# Allegro board 2019-09-09-4.brd
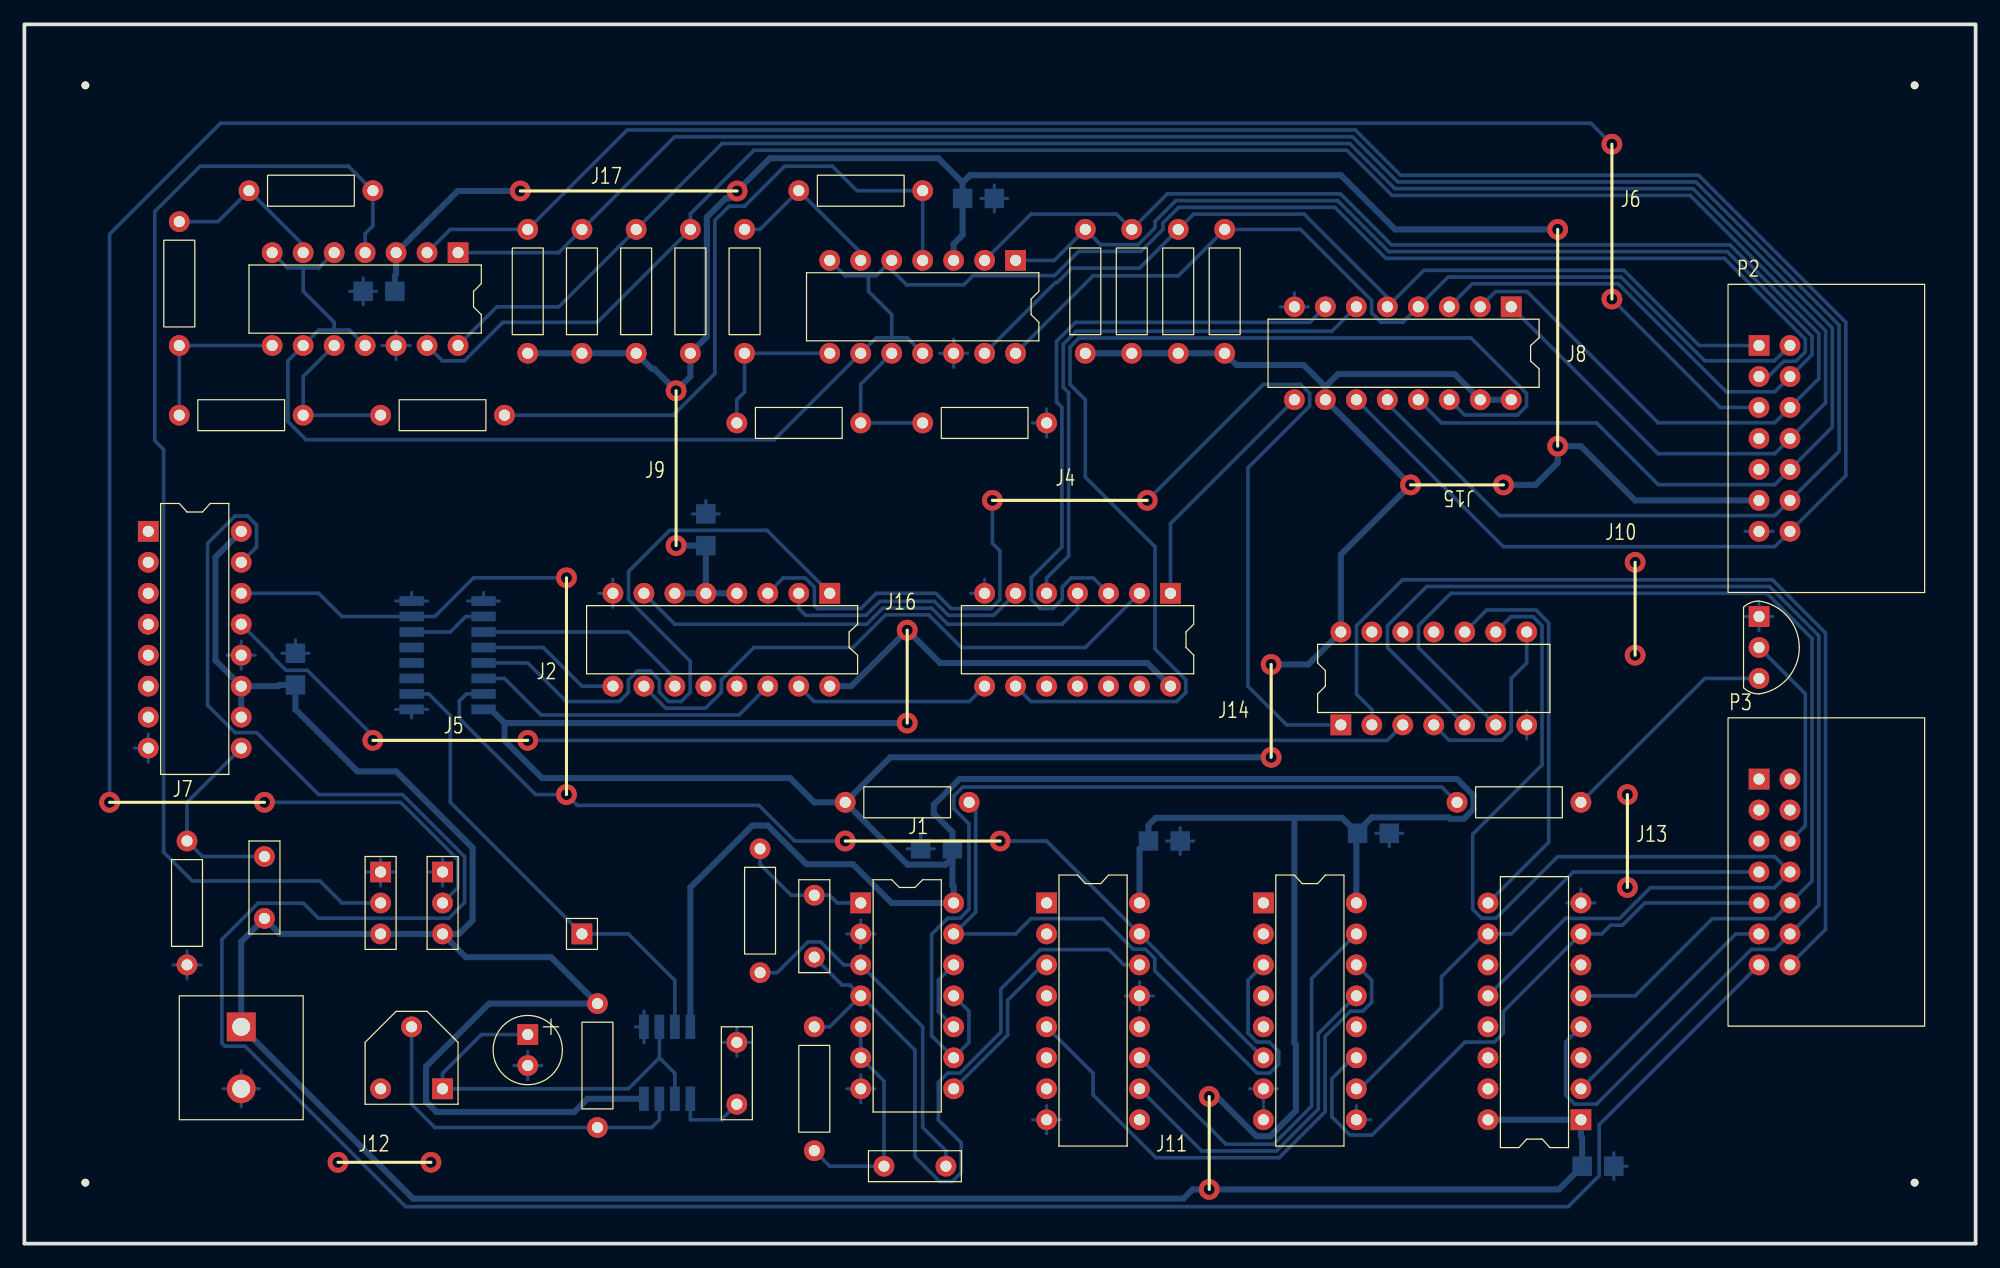
[diagram p0: board, top side]
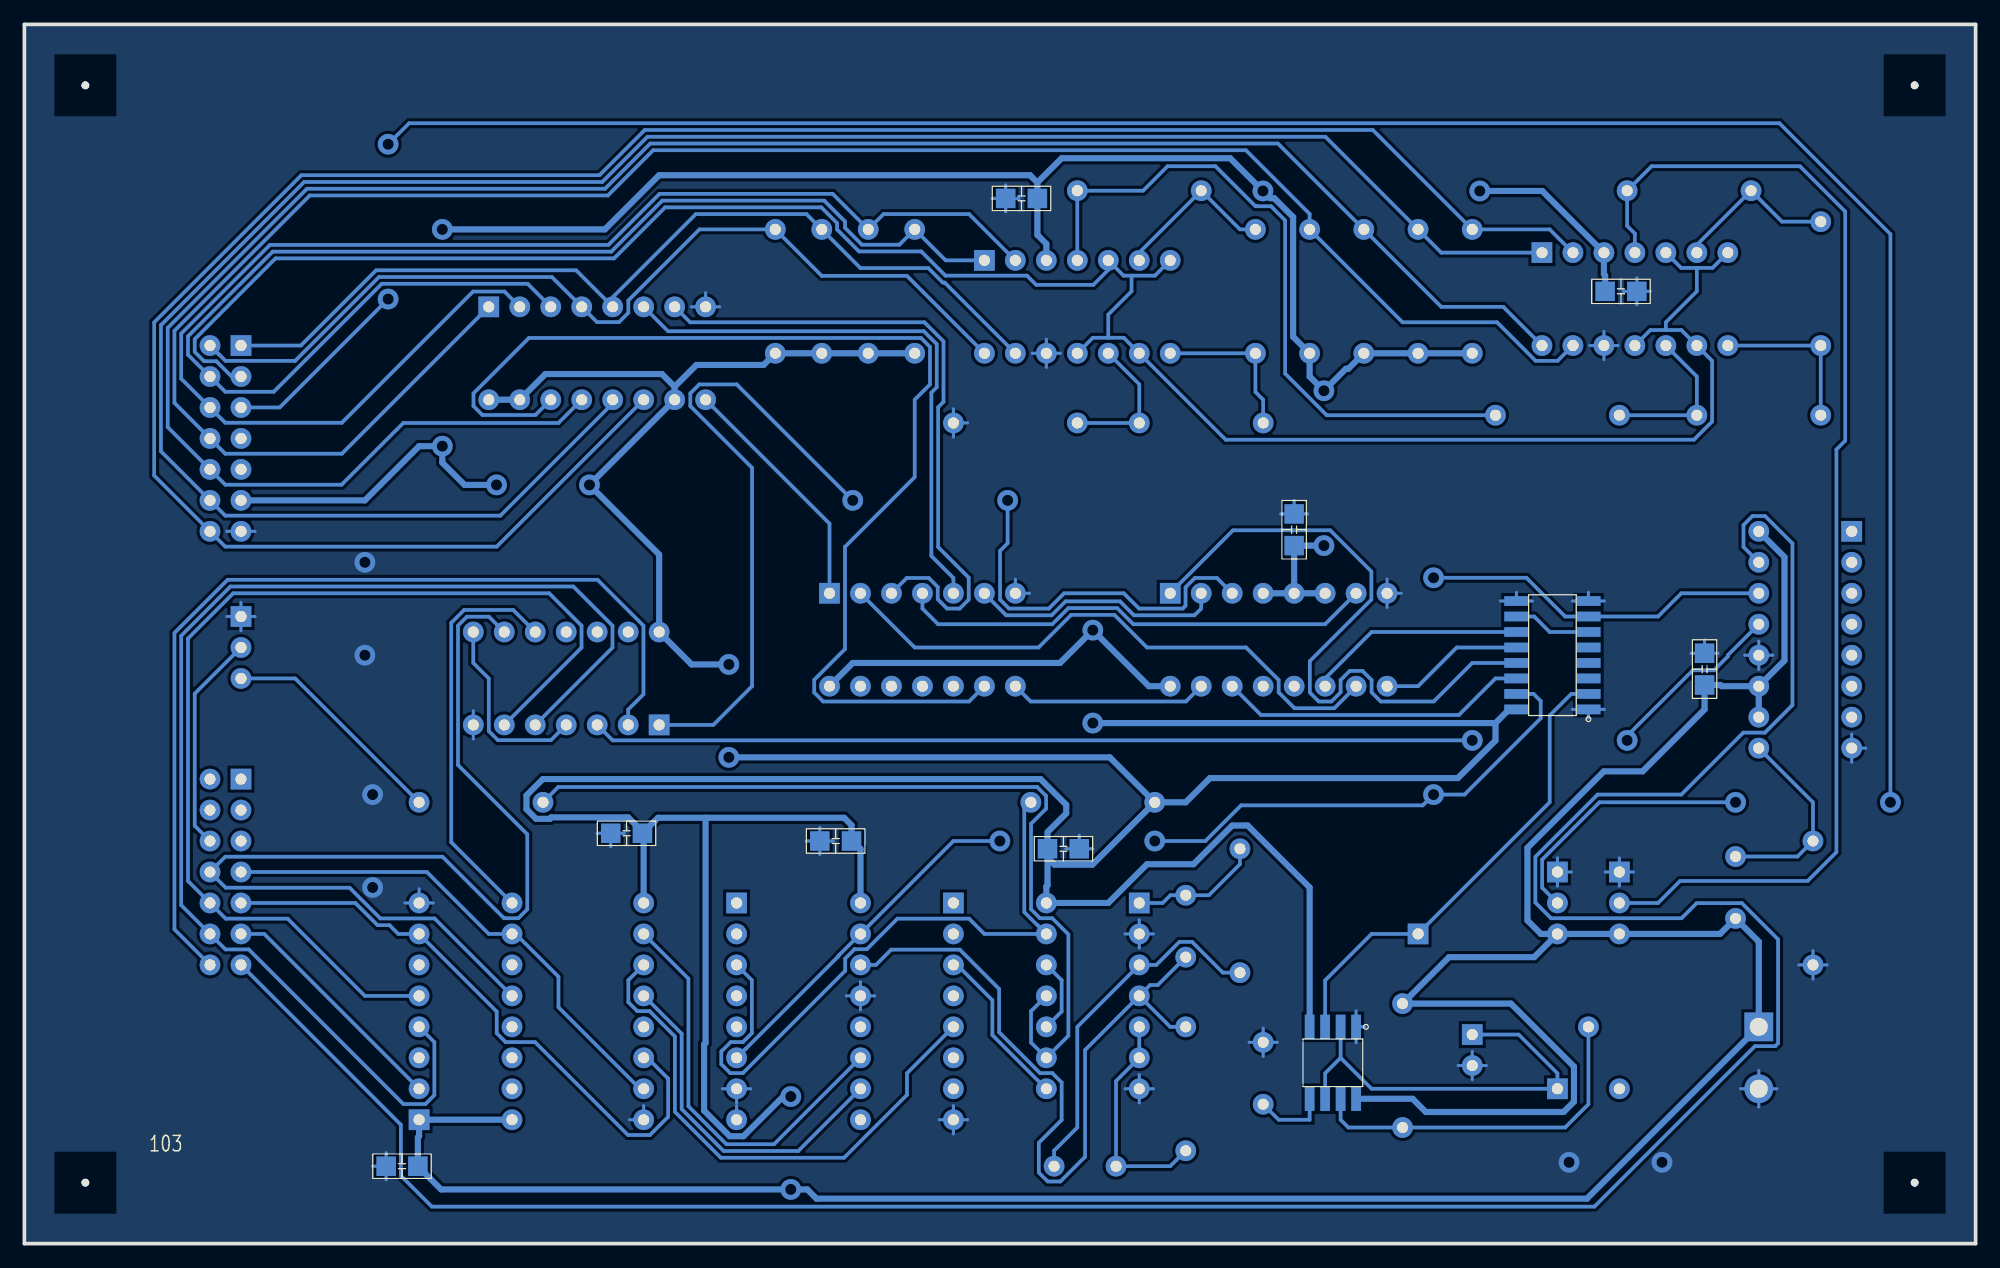
[diagram p1: board, bottom side, seen from below]

Outline 160 x 100 mm; copper layers: TOP, BOTTOM. Coordinates in mm from the lower left corner of the outline.
Outline path: 0,100 0,0 160,0 160,100 0,100

## Design rules (mm)
nets with their own width: min track width 0.5; nets +5V GND

## Placement (name value [footprint] x y rotation side)
C1  10uF  [CAP196]  41.27 17.14 0 top
C2  0.1uF  [CAP300]  58.42 11.43 90 top
C3  0.1uF  [CAP300]  19.68 26.67 90 top
C6  0.1uF  [SMDCAP]  30.48 78.11 180 bottom
C7  0.1uF  [SMDCAP]  76.83 85.72 0 bottom
C8  0.1uF  [SMDCAP]  55.88 57.15 90 bottom
C9  0.1uF  [SMDCAP]  109.22 33.66 0 bottom
C10  0.1uF  [SMDCAP]  92.08 33.02 0 bottom
C11  0.1uF  [SMDCAP]  22.23 45.72 90 bottom
C12  0.1uF  [SMDCAP]  127.64 6.35 0 bottom
C13  0.1uF  [SMDCAP]  76.2 32.38 180 bottom
C14  0.1uF  [CAP300]  64.77 28.57 270 top
C15  0.1uF  [CAP300]  75.56 6.35 180 top
J1  -  [JUMPER4]  80.01 33.02 0 bottom
J2  -  [JUMPER6]  44.45 36.83 270 bottom
J4  -  [JUMPER4]  92.08 60.96 0 bottom
J5  -  [JUMPER4]  41.27 41.27 0 bottom
J6  -  [JUMPER4]  130.18 77.47 270 bottom
J7  -  [JUMPER4]  6.99 36.2 180 bottom
J8  -  [JUMPER6]  125.73 83.19 90 bottom
J9  -  [JUMPER4]  53.44 57.25 270 bottom
J10  -  [JUMPER2]  132.08 55.88 90 bottom
J11  -  [JUMPER2]  97.16 12.06 90 bottom
J12  -  [JUMPER2]  33.34 6.67 0 bottom
J13  -  [JUMPER2]  131.44 29.21 270 bottom
J14  -  [JUMPER2]  102.23 39.88 270 bottom
J15  -  [JUMPER2]  121.28 62.23 0 bottom
J16  -  [JUMPER2]  72.39 42.7 270 bottom
J17  -  [JUMPER6]  58.44 86.34 0 bottom
NOREF  -  [unnamed]  155 5 0 top
NOREF#2  -  [unnamed]  155 95 0 top
NOREF#3  -  [unnamed]  5 5 0 top
NOREF#4  -  [#2]  0 0 90 top
NOREF#5  -  [unnamed]  5 95 0 top
NOREF#6  -  [#2]  0 0 0 top
P1  CON2  [POWER2]  17.78 17.78 270 top
P2  CON14  [JUMPER14]  142.24 73.66 270 top
P3  CON14  [JUMPER14]  142.24 38.1 270 top
Q1  2SC1815  [TO92]  142.24 51.44 270 top
R1  10K  [RES400]  46.99 19.68 180 top
R2  10K  [RES400]  28.57 86.36 90 top
R3  10K  [RES400]  12.7 83.82 180 top
R4  10K  [RES400]  12.7 67.94 270 top
R5  10K  [RES400]  29.21 67.94 270 top
R6  10K  [RES400]  73.66 86.36 90 top
R7  10K  [RES400]  59.05 83.19 180 top
R8  10K  [RES400]  58.42 67.31 270 top
R9  10K  [RES400]  73.66 67.31 270 top
R10  10K  [RES400]  41.27 73.03 0 top
R11  10K  [RES400]  45.72 73.03 0 top
R12  10K  [RES400]  50.16 73.03 0 top
R13  10K  [RES400]  54.61 73.03 0 top
R14  10K  [RES400]  90.81 73.03 0 top
R15  10K  [RES400]  87 73.03 0 top
R16  10K  [RES400]  98.42 73.03 0 top
R17  10K  [RES400]  94.61 73.03 0 top
R18  10K  [RES400]  13.34 33.02 180 top
R19  10K  [RES400]  60.33 32.38 180 top
R20  10K  [RES400]  64.77 17.78 180 top
R21  10K  [RES400]  67.31 36.2 270 top
R22  10K  [RES400]  127.64 36.2 90 top
TP1  TP  [JUMPER1]  45.72 25.4 0 top
U1  NE555  [SOP8]  50.8 17.78 270 bottom
U2  LM339  [DIP14_3]  35.56 81.28 270 top
U3  LM339  [DIP14_3]  81.28 80.64 270 top
U4  40147  [DIP16_3]  121.92 76.83 270 top
U5  4069  [DIP14_3]  93.98 53.34 270 top
U6  4518  [SOP16]  31.75 43.81 0 bottom
U7  4585  [DIP16_3]  66.04 53.34 270 top
U8  4027  [DIP16_3]  10.16 58.42 0 top
U9  4071  [DIP14_3]  107.95 42.55 90 top
U10  4001  [DIP14_3]  68.58 27.94 0 top
U11  4017  [DIP16_3]  83.82 27.94 0 top
U12  4051  [DIP16_3]  101.6 27.94 0 top
U13  4175  [DIP16_3]  127.64 10.16 180 top
VR1  1M  [RESADJ]  34.29 12.7 270 top
VR2  10K  [JUMPER3]  29.21 30.48 270 top
VR3  10K  [JUMPER3]  34.29 30.48 270 top

## Library data of the parts
C1 = Cap Pol
C2 C3 C14 C15 = Cap NP: Tolerance: ***; User Part Number: ***
C6-C13 = Cap TEXT
J1 J2 J4-J17 = JUMPER
P1 = CON2
P2 P3 = CON14: User Part Number: ***
Q1 = 2SC1815
R1-R22 = resistor: Tolerance: ***; User Part Number: ***
TP1 = TP: User Part Number: ***
U1 = NE555
U2 U3 = LM339: Tolerance: ***; User Part Number: ***
U4 = 40147: Tolerance: ***; User Part Number: ***
U5 = 4069: Tolerance: ***; User Part Number: ***
U6 = 4518
U7 = 4585: Tolerance: ***; User Part Number: ***
U8 = 4027: Tolerance: ***; User Part Number: ***
U9 = 4071: Tolerance: ***; User Part Number: ***
U10 = 4001: Tolerance: ***; User Part Number: ***
U11 = 4017: Tolerance: ***; User Part Number: ***
U12 = 4051: Tolerance: ***; User Part Number: ***
U13 = 4175: Tolerance: ***; User Part Number: ***
VR1 = VR1: Tolerance: ***; User Part Number: ***
VR2 VR3 = VR2: User Part Number: ***

## Footprints (pads in the part's own frame, mm; a bottom-side part is the same pattern mirrored in y, then rotated)
CAP196
  rect 1.7x1.7 hole 0.914: 1(0,0)
  round 1.7 hole 0.91: 2(0,-2.54)
CAP300
  round 1.7 hole 0.91: 1(0,0) 2(5.08,0)
DIP14_3
  rect 1.7x1.7 hole 0.914: 1(0,0)
  round 1.7 hole 0.91: 2(0,-2.54) 3(0,-5.08) 4(0,-7.62) 5(0,-10.16) 6(0,-12.7) 7(0,-15.24) 8(7.62,-15.24) 9(7.62,-12.7) 10(7.62,-10.16) 11(7.62,-7.62) 12(7.62,-5.08) 13(7.62,-2.54) 14(7.62,0)
DIP16_3
  rect 1.7x1.7 hole 0.914: 1(0,0)
  round 1.7 hole 0.91: 2(0,-2.54) 3(0,-5.08) 4(0,-7.62) 5(0,-10.16) 6(0,-12.7) 7(0,-15.24) 8(0,-17.78) 9(7.62,-17.78) 10(7.62,-15.24) 11(7.62,-12.7) 12(7.62,-10.16) 13(7.62,-7.62) 14(7.62,-5.08) 15(7.62,-2.54) 16(7.62,0)
JUMPER1
  rect 1.7x1.7 hole 0.914: 1(0,0)
JUMPER3
  rect 1.7x1.7 hole 0.914: 1(0,0)
  round 1.7 hole 0.91: 2(2.54,0) 3(5.08,0)
JUMPER14
  rect 1.7x1.7 hole 0.914: 1(0,0)
  round 1.7 hole 0.91: 2(0,2.54) 3(2.54,0) 4(2.54,2.54) 5(5.08,0) 6(5.08,2.54) 7(7.62,0) 8(7.62,2.54) 9(10.16,0) 10(10.16,2.54) 11(12.7,0) 12(12.7,2.54) 13(15.24,0) 14(15.24,2.54)
POWER2
  rect 2.362x2.362 hole 1.473: 1(0,0)
  round 2.362 hole 1.473: 2(5.08,0)
RES400
  round 1.7 hole 0.91: 1(0,0) 2(0,10.16)
RESADJ
  rect 1.7x1.7 hole 0.914: 1(0,0)
  round 1.7 hole 0.91: 2(-5.08,-2.54) 3(0,-5.08)
SMDCAP
  rect 1.6x1.6 smd: 1(0.1,0) 2(2.7,0)
SOP8
  rect 2x0.8 smd: 1(0,0) 2(0,-1.27) 3(0,-2.54) 4(0,-3.81) 5(5.9,-3.81) 6(5.9,-2.54) 7(5.9,-1.27) 8(5.9,0)
SOP16
  rect 2x0.8 smd: 1(0,0) 2(0,-1.27) 3(0,-2.54) 4(0,-3.81) 5(0,-5.08) 6(0,-6.35) 7(0,-7.62) 8(0,-8.89) 9(5.9,-8.89) 10(5.9,-7.62) 11(5.9,-6.35) 12(5.9,-5.08) 13(5.9,-3.81) 14(5.9,-2.54) 15(5.9,-1.27) 16(5.9,0)
TO92
  rect 1.7x1.7 hole 0.914: 1(0,0)
  round 1.7 hole 0.91: 2(2.54,0) 3(5.08,0)
unnamed
  round 0.635 hole 3 unplated: (0,0)

## Nets
+5V: C3.1 C6.1 C7.1 C8.1 C9.1 C10.1 C11.1 C12.1 C13.1 P1.1 P2.11 R1.1 R10.1 R11.1 R12.1 R13.1 R14.1 R15.1 R16.1 R17.1 R21.1 U1.4(RST) U1.8(VCC) U2.3 U3.3 U4.10(I\9\) U4.15(I\0\) U4.16(VCC) U5.14 U6.16 U7.4(A>BIN) U7.5(A<BIN) U7.6(A=BIN) U7.16(VCC) U8.10(J) U8.11(K) U8.16 U9.14 U10.14 U11.16(VCC) U12.16(VCC) U13.1(R\S\T\) U13.16(VCC) VR2.3(A) VR3.3(A)
GND: C1.2 C2.2 C6.2 C7.2 C8.2 C9.2 C10.2 C11.2 C12.2 C13.2 P1.2 P2.13 Q1.1(B) R9.2 R18.2 U1.1(GND) U2.12 U3.12 U4.8(GND) U5.7 U6.1(CLK) U6.8 U6.9(CLK) U7.8(GND) U8.8 U8.12(RST) U9.7 U10.2(I1) U10.7 U11.8(GND) U11.13(C\K\E\N\) U12.7(VEE) U12.8(GND) U12.9(C) U13.8(GND) VR2.1(WIPER) VR3.1(WIPER)
AD0: P2.14 R10.2 U2.2(OUT) U4.11(I\1\)
AD1: P2.12 R11.2 U2.1(OUT) U4.12(I\2\)
AD2: P2.10 R12.2 U2.14(OUT) U4.13(I\3\)
AD3: P2.8 R13.2 U2.13(OUT) U4.1(I\4\)
AD4: P2.6 R14.2 U3.2(OUT) U4.2(I\5\)
AD5: P2.4 R15.2 U3.1(OUT) U4.3(I\6\)
AD6: P2.2 R16.2 U3.14(OUT) U4.4(I\7\)
AD7: P2.1 R17.2 U3.13(OUT) U4.5(I\8\)
CLK: TP1.1 U1.3(OUT) U6.2(EN)
MOTOR-GND: P3.6 Q1.2(C)
MR: U6.7(CLR) U6.15(CLR) U8.14(Q\) U11.15(RST) U12.6(E\N\)
MR2: P3.13 U8.15(Q)
SW1: P3.14 U9.2(I1)
SW2: P3.12 U9.5(I0) U13.4(D0)
SW3: P3.10 U9.6(I1) U13.5(D1)
SW4: P3.8 U9.9(I1) U13.12(D2)
SWLED1: P3.11 U13.2(Q0)
SWLED2: P3.9 U12.11(A) U13.7(Q1)
SWLED3: P3.7 U12.10(B) U13.10(Q2)
VR3: P2.5 VR3.2(B)
VR-LED: P2.3 U2.5(+IN) U2.7(+IN) U2.9(+IN) U2.11(+IN) U3.5(+IN) U3.7(+IN) U3.9(+IN) U3.11(+IN)
N01288: R2.2 R3.1 U2.6(-IN)
N01292: R2.1 U2.4(-IN) VR2.2(B)
N01329: R3.2 R4.1 U2.8(-IN)
N01410: R4.2 R5.1 U2.10(-IN)
N01484: R5.2 R6.1 U3.4(-IN)
N01558: R6.2 R7.1 U3.6(-IN)
N01632: R7.2 R8.1 U3.8(-IN)
N01706: R8.2 R9.1 U3.10(-IN)
N02575: U4.9(A\) U5.1(I)
N02579: U4.7(B\) U5.3(I)
N02586: U4.6(C\) U5.5(I)
N02598: U4.14(D\) U5.9(I)
N02610: U5.8(O) U7.15(A3)
N02617: U5.6(O) U7.2(A2)
N02629: U5.4(O) U7.7(A1)
N02644: U5.2(O) U7.10(A0)
N02656: U7.3(A=BOUT) U9.1(I0)
N02681: U8.13(CLK) U9.3(O)
N02693: C3.2 R18.1 U8.9(SET)
N03322: U6.11(Q0) U7.11(B0)
N03324: U6.12(Q1) U7.9(B1)
N03326: U6.13(Q2) U7.1(B2)
N03328: U6.14(Q3) U7.14(B3)
N03342: U6.6(Q3) U6.10(EN)
N03473: C1.1 U1.2(TRIG) U1.6(THR) VR1.1
N03488: R1.2 U1.7(DISC) VR1.2
N03530: C2.1 U1.5(CV)
N06929: C15.1 R19.2 U10.3(O)
N06949: C15.2 R20.2 U10.5(I0) U10.6(I1)
N06975: C14.1 R19.1 U10.1(I0)
N06984: C14.2 R20.1 U10.4(O) U11.14(CLK)
N07032: U11.11(9) U12.15(X2)
N07059: U11.5(6) U12.14(X1)
N07071: U11.10(4) U12.13(X0)
N07083: U9.4(O) U9.8(I0)
N07087: U9.10(O) U13.9(CLK)
N07200: R21.2 U10.13(I1) U12.3(X)
N07279: R22.2 U10.9(I1) U10.11(O)
N07298: U10.10(O) U10.12(I0)
N07374: Q1.3(E) R22.1
N10291: U10.8(I0) U11.3(0)

Pads without a net: P2 7 9; P3 1 2 3 4 5; U5 10 11 12 13; U6 3 4 5; U7 12 13; U8 1 2 3 4 5 6 7; U9 11 12 13; U11 1 2 4 6 7 9 12; U12 1 2 4 5 12; U13 3 6 11 13 14 15; VR1 3

## Via types
v1: diameter 1.7, hole 0.91, TOP to BOTTOM, 32 vias

## Routing (per net, layer and track width the routed paths; a pad name or vN(x,y) marks a point on that pad's centre or on a via; arc(x,y) is an arc through that point)
+5V: length 802.7
  BOTTOM w0.5: R21.1 72.42,31.08 75.53,31.08 76.1,31.65 ; R21.1 71,39.88 v1(102.23,39.88) ; R21.1 64.77,36.2 62.78,38.18 42.45,38.18 39.37,41.27 39.37,42.7 ; VR3.3 VR2.3 20.95,25.4 C3.1 17.78,24.77 P1.1 31.87,3.69 95.04,3.69 95.8,4.45 v1(97.16,4.45) 125.83,4.45 C12.1 127.73,8.71 127.64,8.81 U13.1 U13.16 ; VR3.3 35.64,25.4 36.75,26.51 36.75,32.46 30.48,38.73 27.31,38.73 22.23,43.82 C11.1 20.92,45.82 20.82,45.72 U8.11 ; VR3.3 36.2,23.5 43.18,23.5 R1.1 38.1,19.68 32.94,14.52 32.94,11.64 33.78,10.79 45.09,10.79 46.17,11.88 U1.8 ; 104.14,34.92 104.14,16.47 104.26,16.34 104.26,10.91 102.16,8.81 101.04,8.81 97.78,12.06 v1(97.16,12.06) ; 104.14,34.92 108.05,34.92 C9.1 ; 104.14,34.92 92.78,34.92 92.17,34.32 C10.1 92.08,33.02 91.44,32.38 U11.16 ; U7.5 C8.1 v1(53.44,57.25) ; U7.5 U7.4 ; U7.5 U7.6 ; 76.94,87.03 74.94,89.02 61.13,89.02 v1(58.44,86.34) 57.85,85.75 57.52,85.75 55.96,84.19 55.96,74.38 R13.1 54.61,71.12 v1(53.44,69.95) 51.63,71.75 51.44,71.75 R12.1 R11.1 R10.1 ; 76.94,87.03 77.54,87.63 107.95,87.63 112.39,83.19 v1(125.73,83.19) ; 76.94,87.03 76.94,82.73 76.2,82 U3.3 ; U8.11 U8.10 ; U8.11 15.76,47.74 15.67,47.83 15.67,56.31 U8.16 ; C6.1 30.38,79.41 30.48,79.51 U2.3 35.54,86.34 v1(40.66,86.34) ; 121.92,69.22 119.38,69.22 117.27,71.32 107.72,71.32 106.68,70.28 ; 106.68,70.28 104.89,72.07 99.38,72.07 R16.1 R17.1 R14.1 R15.1 ; 106.68,70.28 106.68,69.22 v1(113.67,62.23) 107.95,56.52 U9.14 105.29,47.5 v1(102.23,47.5) ; U5.14 92.08,47.62 75.08,47.62 v1(72.39,50.31) 67.8,45.72 U7.16 ; 39.37,42.7 38.25,43.81 U6.16 ; 39.37,42.7 v1(72.39,42.7) ; C9.1 109.32,33.55 109.22,33.45 U12.16 ; C9.1 109.33,33.8 110.49,34.96 116.8,34.96 116.91,34.84 118.04,34.84 118.83,35.63 118.83,36.76 117.48,38.1 76.68,38.1 74.57,35.99 74.57,35.28 76.1,33.76 C13.1 76.1,31.65 ; 76.1,31.65 76.1,29.39 76.2,29.29 U10.14 71.12,27.94 67.94,31.11 64.14,31.11 60.96,34.29 59.69,34.29 54.61,29.21 U1.4 ; v1(121.28,62.23) 123.91,62.23 125.73,64.05 v1(125.73,65.41) 127.63,65.41 132.08,60.96 P2.11
GND: length 139.4
  BOTTOM w0.254: R9.2 83.82,68.47 ; R9.2 83.82,66.15 ; R9.2 82.66,67.31 ; 111.92,32.55 C9.2 ; C9.2 110.81,33.66 ; C9.2 113.03,33.66 ; U12.8 101.6,11.32 ; 102.98,76.83 U4.8 ; U4.8 104.14,77.99 ; U4.8 105.3,76.83 ; U6.8 33.06,52.7 ; U6.8 30.44,52.7 ; U6.8 31.75,53.41 ; 10.16,39.48 U8.8 ; U8.8 9,40.64 ; U8.8 10.16,41.8 ; VR2.1 30.37,30.48 ; VR2.1 29.21,31.64 ; VR2.1 29.21,29.32 ; VR2.1 28.05,30.48 ; 29.32,73.66 U2.12 ; U2.12 30.48,72.5 ; U2.12 30.48,74.82 ; U2.12 31.64,73.66 ; P1.2 17.78,14.19 ; P1.2 19.27,12.7 ; P1.2 17.78,11.21 ; P1.2 16.29,12.7 ; 94.78,31.91 C10.2 ; C10.2 95.88,33.02 ; C10.2 93.67,33.02 ; C10.2 94.78,34.13 ; 67.42,12.7 U10.7 ; U10.7 69.74,12.7 ; U10.7 68.58,11.54 ; U10.7 68.58,13.86 ; C6.2 28.89,78.11 ; C6.2 27.78,79.21 ; C6.2 26.67,78.11 ; C6.2 27.78,77 ; 110.38,10.16 U12.9 109.22,11.32 ; U13.8 128.79,27.94 ; U13.8 127.64,29.1 ; U13.8 126.48,27.94 ; U3.12 76.2,74.18 ; U3.12 76.2,71.87 ; U3.12 75.04,73.03 ; U3.12 77.36,73.03 ; 90.28,20.32 U11.13 ; U11.13 92.6,20.32 ; U11.13 91.44,21.48 ; U11.13 91.44,19.16 ; 48.26,52.18 U7.8 ; U7.8 47.1,53.34 ; U7.8 48.26,54.5 ; C7.2 79.53,86.83 ; C7.2 79.53,84.62 ; C7.2 78.43,85.72 ; C7.2 80.64,85.72 ; U8.12 18.94,48.26 ; U8.12 16.62,48.26 ; U8.12 17.78,49.42 ; U8.12 17.78,47.1 ; 123.19,43.7 U9.7 123.19,41.39 ; 72.39,32.38 C13.2 ; C13.2 74.61,32.38 ; C13.2 73.5,33.49 ; VR3.1 34.29,31.64 ; VR3.1 34.29,29.32 ; VR3.1 33.13,30.48 ; 67.42,25.4 U10.2 ; U10.2 69.74,25.4 ; U10.2 68.58,24.24 ; U10.2 68.58,26.56 ; C8.2 56.99,59.85 ; C8.2 55.88,60.96 ; C8.2 54.77,59.85 ; 13.34,22.86 14.49,22.86 ; 13.34,22.86 13.34,24.02 ; 13.34,22.86 12.18,22.86 ; 13.34,22.86 13.34,21.7 ; 143.4,58.42 P2.13 141.08,58.42 ; Q1.1 142.24,52.59 ; Q1.1 141.08,51.44 ; Q1.1 142.24,50.28 ; Q1.1 143.4,51.44 ; 101.6,11.54 U12.7 ; U12.7 102.76,12.7 ; U12.7 100.44,12.7 ; C2.2 59.58,16.51 ; C2.2 57.26,16.51 ; C2.2 58.42,15.35 ; C2.2 58.42,17.67 ; C12.2 131.44,6.35 ; C12.2 130.34,5.24 ; C12.2 130.34,7.46 ; C11.2 22.23,49.53 ; C11.2 23.33,48.42 ; C11.2 21.12,48.42 ; U11.8 83.82,11.32 ; U11.8 82.66,10.16 ; U11.8 83.82,9 ; U11.8 84.98,10.16 ; U1.1 50.8,19.09 ; U1.1 50.8,16.47 ; U1.1 50.09,17.78 ; 36.34,52.7 U6.9 ; U6.9 37.65,53.41 ; U6.9 38.96,52.7 ; 30.44,43.81 U6.1 ; U6.1 33.06,43.81 ; U6.1 31.75,43.11 ; 77.58,53.34 U5.7 78.74,54.5 ; C1.2 41.27,15.76 ; C1.2 40.12,14.61 ; C1.2 41.27,13.45 ; C1.2 42.43,14.61
  vias: v1(25.72,6.67) v1(33.34,6.67) v1(131.44,36.83) v1(131.44,29.21) v1(132.08,55.88) v1(132.08,48.26)
AD0: length 187.1
  BOTTOM w0.3: U2.2 34.92,83.19 R10.2 49.43,91.34 109.14,91.34 112.84,87.63 137.29,87.63 149.36,75.56 149.36,63 P2.14 143.53,57.17 121.27,57.17 109.22,69.22
AD1: length 177.3
  BOTTOM w0.3: U2.1 43.81,81.28 R11.2 53.32,90.78 108.91,90.78 112.61,87.08 137.06,87.08 148.8,75.33 148.8,64.98 P2.12 143.53,59.71 120.97,59.71 111.76,68.92 111.76,69.22
AD2: length 172.7
  BOTTOM w0.3: U2.14 38.73,76.83 43.81,76.83 R12.2 57.21,90.23 108.67,90.23 112.38,86.52 136.83,86.52 148.25,75.1 148.25,66.97 P2.10 143.53,62.25 133.99,62.25 128.92,67.31 116.2,67.31 114.3,69.22
AD3: length 167.6
  BOTTOM w0.3: U2.13 34.27,72.41 36.08,72.41 39.24,75.56 46.99,75.56 R13.2 54.61,84.45 59.83,89.68 108.44,89.68 112.15,85.97 136.6,85.97 147.7,74.87 147.7,68.96 P2.8 143.53,64.79 133.97,64.79 U4.1
AD4: length 114.4
  BOTTOM w0.3: U3.2 82.53,84.44 89.55,84.44 R14.2 93.72,86.1 107.92,86.1 112.11,81.92 139.87,81.92 147.14,74.64 147.14,70.94 P2.6 143.53,67.33 133.97,67.33 123.21,78.09 120.63,78.09 U4.2
AD5: length 110.3
  BOTTOM w0.3: U3.1 84.45,80.64 R15.2 88.25,81.93 91.33,81.93 92.71,83.32 92.71,83.84 94.42,85.55 107.69,85.55 111.88,81.36 139.64,81.36 146.59,74.41 146.59,72.91 144.88,71.2 144.86,71.2 P2.4 143.53,69.87 139.55,69.87 130.69,78.72 118.73,78.72 U4.3
AD6: length 76.3
  BOTTOM w0.3: U3.14 87.63,79.38 94.61,79.38 R16.2 104.64,83.19 110.47,77.36 110.47,76.35 111.24,75.58 113.05,75.58 U4.4 116.74,79.28 130.93,79.28 137.8,72.41 143.51,72.41 144.03,72.93 144.05,72.93 P2.2
AD7: length 75.6
  BOTTOM w0.3: P2.1 137.33,73.66 131.16,79.83 114.76,79.83 U4.5 111.76,77.62 104.94,84.44 95.87,84.44 R17.2 91.44,80.01 85.87,80.01 84.68,78.82 84.53,78.82 U3.13
CLK: length 39.3
  BOTTOM w0.3: U1.3 53.34,21.59 49.53,25.4 TP1.1 34.92,36.2 34.92,43.31 33.15,45.09 U6.2
MOTOR-GND: length 18
  BOTTOM w0.3: Q1.2 146.03,45.1 146.03,34.27 P3.6
MR: length 97.2
  BOTTOM w0.3: U12.6 100.87,15.97 100.85,15.97 93.25,23.57 93.25,23.61 91.46,25.4 U11.15 83.82,33.02 v1(80.01,33.02) ; v1(67.31,33.02) 63.16,33.02 60.23,35.94 45.34,35.94 v1(44.45,36.83) 41.91,36.83 35.66,43.08 35.66,44.5 36.25,45.09 U6.15 ; v1(44.45,54.61) 36.83,54.61 33.66,51.44 26.04,51.44 24.13,53.34 U8.14
MR2: length 225
  BOTTOM w0.3: U8.15 19.03,57.13 19.03,58.94 18.3,59.67 17.26,59.67 15.02,57.43 15.02,44.17 15.1,44.09 17.28,41.91 19.05,41.91 24.13,36.83 31,36.83 36.1,31.73 36.1,27.97 34.81,26.69 24.11,26.69 22.88,27.92 19.16,27.92 16.2,24.95 16.2,16.43 16.43,16.2 18.09,16.2 31.26,3.03 126.59,3.03 129.13,5.57 129.13,9.75 P3.13
SW1: length 78.9
  BOTTOM w0.3: P3.14 147.7,25.78 147.7,50.09 143.34,54.45 113,54.45 109.24,50.69 109.24,45.05 110.49,43.8 U9.2
SW2: length 105.2
  BOTTOM w0.3: U9.5 111.78,48.88 111.78,50.69 114.98,53.89 143.1,53.89 147.14,49.86 147.14,27.76 P3.12 143.51,24.13 141.6,24.13 128.92,11.45 127.11,11.45 126.38,12.18 126.38,16.53 U13.4
SW3: length 88.4
  BOTTOM w0.3: U13.5 132.08,20.32 138.41,26.65 143.49,26.65 P3.10 146.59,29.75 146.59,49.63 142.88,53.34 116.97,53.34 114.32,50.69 114.32,48.88 U9.6
SW4: length 88.1
  BOTTOM w0.3: U13.12 126.36,26.67 130.81,26.67 133.33,29.19 143.49,29.19 P3.8 143.53,31.73 125.71,31.73 120.67,26.69 119.5,26.69 118.76,27.42 118.76,33.57 124.44,39.26 124.44,50.69 123.71,51.42 121.9,51.42 U9.9
SWLED1: length 19.9
  BOTTOM w0.3: P3.11 140.34,25.4 U13.2
SWLED2: length 50.4
  BOTTOM w0.3: U12.11 108.92,15.24 107.21,13.53 107.21,10.39 108.7,8.91 110.51,8.91 118.13,16.53 120.53,16.53 121.27,17.26 121.27,19.03 U13.7 129.34,25.4 130.06,26.12 131.04,26.12 132.86,27.94 P3.9
SWLED3: length 41.9
  BOTTOM w0.3: P3.7 127,30.48 121.92,25.4 U13.10 119.72,25.4 116.2,21.89 116.2,19.39 109.52,12.7 U12.10
VR3: length 211.9
  BOTTOM w0.3: v1(130.18,77.47) 139.06,68.58 P2.5 ; v1(6.99,36.2) 6.99,82.8 16.08,91.89 128.45,91.89 v1(130.18,90.17) ; v1(19.68,36.2) 30.85,36.2 35.54,31.5 35.54,29.19 VR3.2
VR-LED: length 183.1
  BOTTOM w0.3: 22.86,80.03 24.15,80.03 U2.5 ; 22.86,80.03 21.57,80.03 U2.7 ; 22.86,80.03 22.86,78.11 25.4,75.56 25.4,74.93 ; 71.12,74.3 72.39,74.3 U3.11 ; 71.12,74.3 69.85,74.3 U3.9 61.49,65.94 23.09,65.94 21.61,67.42 21.61,72.41 U2.9 24.13,74.93 25.4,74.93 ; 71.12,74.3 71.12,76.2 69.22,78.11 69.22,79.39 ; 69.22,79.39 69.87,79.39 U3.5 71.12,79.86 72.34,78.64 77.03,78.64 77.79,79.39 84.47,79.39 86.46,81.38 91.56,81.38 93.36,83.18 93.36,83.7 94.65,84.99 107.46,84.99 111.64,80.81 139.41,80.81 146.03,74.18 146.03,73.14 145.27,72.37 144.26,72.37 143.01,71.12 P2.3 ; 69.22,79.39 67.29,79.39 U3.7 ; 25.4,74.93 26.67,74.93 U2.11
N01288: length 13.7
  BOTTOM w0.3: U2.6 22.86,81.92 R2.2 15.88,83.82 R3.1
N01292: length 98
  BOTTOM w0.3: U2.4 27.94,82.84 28.57,83.47 R2.1 26.57,88.37 14.41,88.37 10.69,84.65 10.69,65.85 11.41,65.13 11.41,32.1 13.77,29.74 24.23,29.74 26.04,27.94 VR2.2
N01329: length 13.3
  BOTTOM w0.3: U2.8 R3.2 R4.1
N01410: length 13.1
  BOTTOM w0.3: R5.1 R4.2 22.86,71.12 U2.10
N01484: length 56.7
  BOTTOM w0.3: R5.2 53.21,67.94 56.62,71.35 56.62,83.92 57.78,85.08 58.96,85.08 58.97,85.09 59.05,85.09 62.33,88.37 66.26,88.37 68.26,86.36 R6.1 U3.4
N01558: length 13.6
  BOTTOM w0.3: U3.6 68.58,81.28 R6.2 60.33,83.19 R7.1
N01632: length 13
  BOTTOM w0.3: U3.8 R7.2 59.05,69.85 58.42,69.22 R8.1
N01706: length 11.8
  BOTTOM w0.3: R9.1 R8.2 68.58,70.48 U3.10
N02575: length 20.1
  BOTTOM w0.3: U5.1 93.98,59.05 104.14,69.22
N02579: length 54.4
  BOTTOM w0.3: U5.3 87.65,54.59 85.84,54.59 85.11,53.86 85.11,52.85 84.34,52.09 83.3,52.09 82.57,52.82 82.57,54.63 85.07,57.13 85.07,68.6 84.63,69.04 84.63,74 86.19,75.56 105.41,75.56 U4.7
N02586: length 46.7
  BOTTOM w0.3: U5.5 83.82,54.59 85.63,56.4 85.63,69.8 85.19,70.24 85.19,73.78 86.25,74.83 107.22,74.83 U4.6
N02598: length 94.9
  BOTTOM w0.3: 116.84,69.22 118.09,67.96 122.44,67.96 123.17,68.69 123.17,69.73 118.63,74.28 86.47,74.28 85.74,73.55 85.74,70.47 87,69.22 87,62.87 92.71,57.15 92.71,48.76 95.23,46.24 95.23,45.2 94.5,44.47 82.53,44.47 U5.9
N02610: length 16.3
  BOTTOM w0.3: U5.8 77.49,44.47 64.75,44.47 U7.15
N02617: length 21
  BOTTOM w0.3: U5.6 81.28,53.32 79.49,51.53 75.77,51.53 74.62,52.68 70.16,52.68 69.01,51.53 64.05,51.53 63.5,52.09 U7.2
N02629: length 39.5
  BOTTOM w0.3: U5.4 86.36,52.09 85.07,50.8 75.72,50.8 74.39,52.12 70.39,52.12 69.07,50.8 53.34,50.8 U7.7
N02644: length 48.1
  BOTTOM w0.3: U5.2 87,48.9 76.84,48.9 74.16,51.57 70.62,51.57 67.94,48.9 59.82,48.9 57.15,46.22 57.15,45.22 55.85,43.91 52.59,43.91 50.8,45.7 U7.10
N02656: length 83.8
  BOTTOM w0.3: U7.3 62.21,54.59 64.02,54.59 64.79,53.83 64.79,52.32 65.02,52.09 68.59,52.09 69.85,53.34 74.74,53.34 76,52.09 79.26,52.09 79.99,52.82 79.99,56.82 79.38,57.44 v1(79.38,60.96) ; v1(92.08,60.96) 101.58,70.47 104.66,70.47 105.39,69.73 105.39,68.69 100.33,63.63 100.33,45.72 103.5,42.55 U9.1
N02681: length 87.3
  BOTTOM w0.3: U9.3 111.76,41.27 v1(41.27,41.27) ; U8.13 20.32,48.26 20.32,48.15 21.45,47.02 23.19,47.02 28.57,41.64 v1(28.57,41.27)
N02693: length 16.3
  BOTTOM w0.3: U8.9 13.34,36.2 R18.1 14.61,31.75 C3.2
N03322: length 17.9
  BOTTOM w0.3: U6.11 49.53,50.16 53.34,46.35 U7.11
N03324: length 11.9
  BOTTOM w0.3: 37.65,48.9 42.55,48.9 45.72,45.72 U7.9
N03326: length 53.9
  BOTTOM w0.3: U6.13 41.27,47.62 44.43,44.47 48.78,44.47 49.53,45.22 49.53,46.22 50.28,46.97 51.32,46.97 52.07,46.22 52.07,45.22 52.82,44.47 53.86,44.47 54.59,45.2 54.59,47.77 49.55,52.82 49.55,55.13 52.92,58.5 60.89,58.5 66.04,53.36 U7.1
N03328: length 25.5
  BOTTOM w0.3: U7.14 58.6,43.36 42.37,43.36 39.37,46.35 U6.14
N03342: length 6.4
  BOTTOM w0.3: 37.65,51.44 36.2,51.44 34.92,50.16 U6.6
N03473: length 34.8
  BOTTOM w0.3: U1.6 53.34,13.97 52.07,15.24 ; C1.1 37.47,17.14 34.29,13.97 VR1.1 49.53,12.7 52.07,15.24 ; 52.07,15.24 U1.2
N03488: length 29.4
  BOTTOM w0.3: VR1.2 31.75,11.43 33.66,9.53 R1.2 51.44,9.53 52.07,10.16 U1.7
N03530: length 6.1
  BOTTOM w0.3: C2.1 57.15,10.16 54.61,10.16 U1.5
N06929: length 29.5
  BOTTOM w0.3: R19.2 61.73,22.23 64.25,24.75 65.29,24.75 67.18,22.86 U10.3 73.66,17.78 73.66,9.53 75.56,7.62 C15.1
N06949: length 18.5
  BOTTOM w0.3: U10.5 U10.6 70.48,13.34 C15.2 66.04,6.35 R20.2
N06975: length 10.8
  BOTTOM w0.3: U10.1 66.66,27.94 66.02,28.57 C14.1 62.87,28.57 60.33,31.12 R19.1
N06984: length 61.7
  BOTTOM w0.3: U10.4 67.69,21.21 67.06,21.21 64.77,23.5 ; U10.4 66.04,17.78 R20.1 ; U10.4 73.03,15.88 73.03,7.12 75.05,5.1 76.08,5.1 76.82,5.83 76.82,8.27 74.95,10.14 74.95,13.22 75.71,13.99 76.72,13.99 80.07,17.34 80.07,20.89 83.3,24.11 88.92,24.11 90.17,22.86 U11.14
N07032: length 34
  BOTTOM w0.3: U11.11 98.53,8.15 102.43,8.15 105.55,11.27 105.55,21.73 U12.15
N07059: length 44.6
  BOTTOM w0.3: U12.14 110.47,21.61 110.47,19.8 109.74,19.07 108.73,19.07 106.66,16.99 106.66,10.81 102.89,7.04 92.78,7.04 87.63,12.2 87.63,13.97 U11.5
N07071: length 28.8
  BOTTOM w0.3: U12.13 109.2,20.32 106.1,17.22 106.1,11.04 102.66,7.6 96.54,7.6 U11.10
N07083: length 15.8
  BOTTOM w0.3: U9.8 123.19,47.62 121.92,46.35 121.92,42.04 121.17,41.29 116.82,41.29 U9.4
N07087: length 33.1
  BOTTOM w0.3: U9.10 119.92,51.97 123.94,51.97 125,50.91 125,32.92 U13.9
N07200: length 55.4
  BOTTOM w0.3: U12.3 100.35,21.61 100.35,17.26 101.08,16.53 102.09,16.53 102.85,15.76 102.85,14.72 102.12,13.99 101.08,13.99 92.69,22.37 92.69,23.38 91.93,24.15 90.92,24.15 88.41,26.65 82.53,26.65 81.28,25.4 U10.13 76.93,26.13 76.95,26.13 78.01,27.19 78.01,35.66 R21.2
N07279: length 72.8
  BOTTOM w0.3: U10.11 77.45,19.07 77.45,16.49 U10.9 74.39,17.05 74.39,25.37 75.71,26.69 76.72,26.69 77.45,27.42 77.45,34.44 76.22,35.67 76.22,36.72 76.95,37.45 116.22,37.45 R22.2
N07298: length 6.1
  BOTTOM w0.3: U10.12 74.95,21.61 74.95,19.03 U10.10
N07374: length 18.8
  BOTTOM w0.3: R22.1 137.79,46.35 Q1.3
N10291: length 13.5
  BOTTOM w0.3: U11.3 83.52,22.86 80.63,19.97 80.63,17.11 76.22,12.7 U10.8

## Copper pours and planes (outline as drawn; the poured copper is in the pictures)
GND on BOTTOM: 0,0 0,100 160,100 160,0 ; 84 cut-outs

## Text on the board
Ref Des/Silkscreen Bottom: 103
PLACE_BOUND_TOP: FIGURE | SIZE | 0.91 | 0.914 | 1.473 | 3.0 | DRILL CHART: TOP to BOTTOM | ALL UNITS ARE IN MILLIMETERS | PLATED | NON-PLATED | QTY | 274 | 19 | 1 | 4
